# Altium PCB Timebase_PCB.PcbDoc
Units mm, origin at the board's own origin, x right, y up, seen from the top; angles counter-clockwise.
Board outline 50 x 100.01 mm, 4 copper layers (Top Layer, Int1 (GND), Int2 (PWR), Bottom Layer), stack 1.369 mm thick; 44 components, 34 nets, 226 pads, 801 vias.
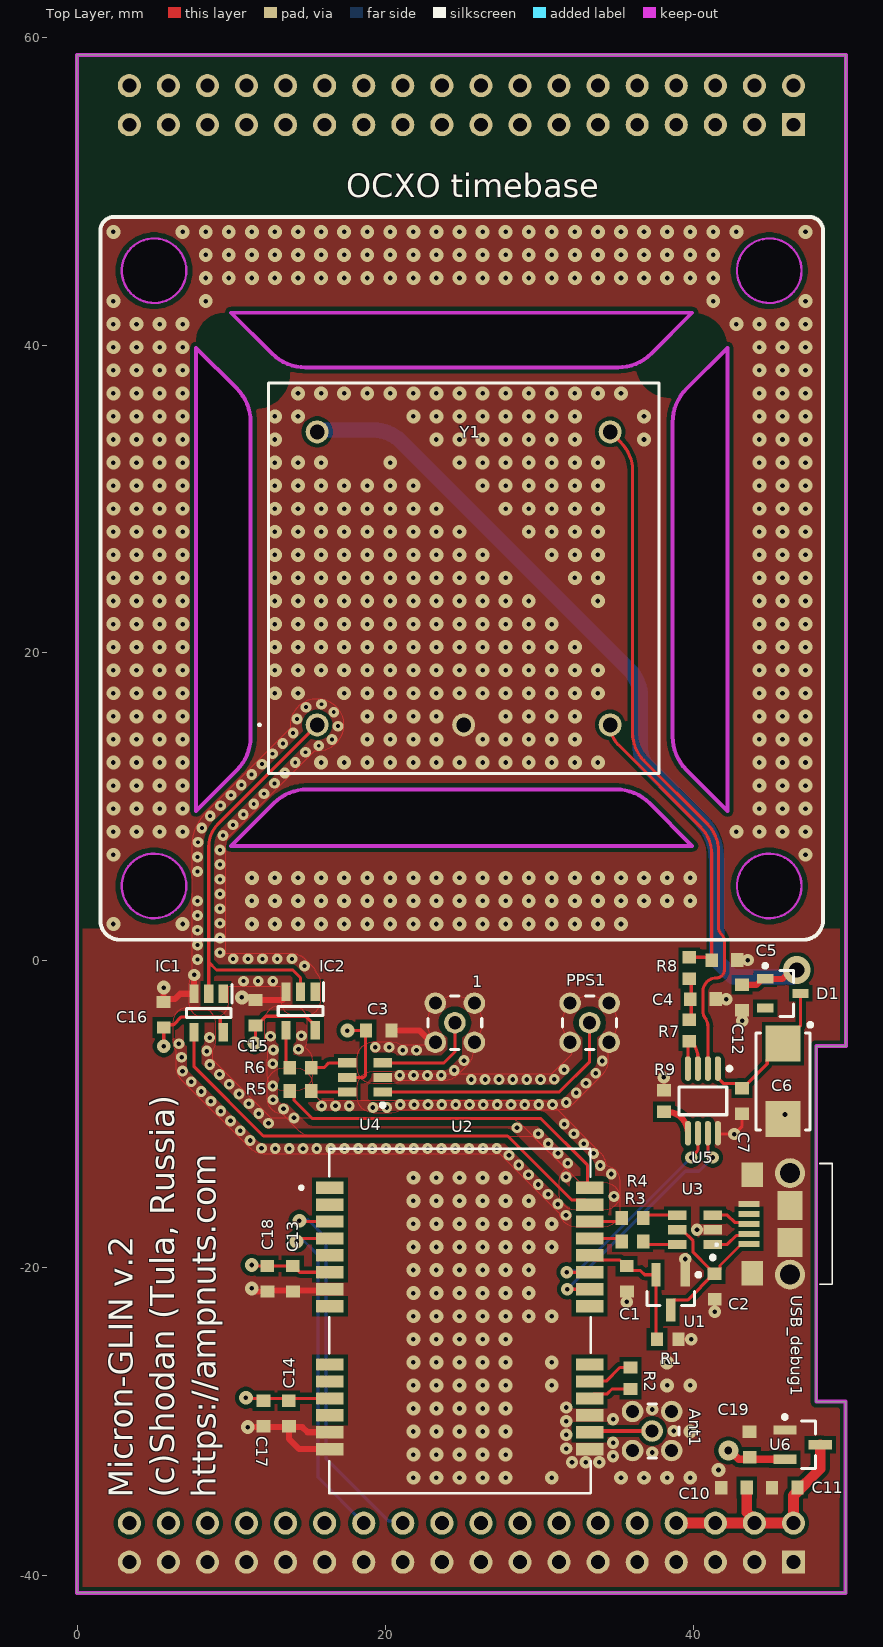
[diagram p0: Top Layer view]
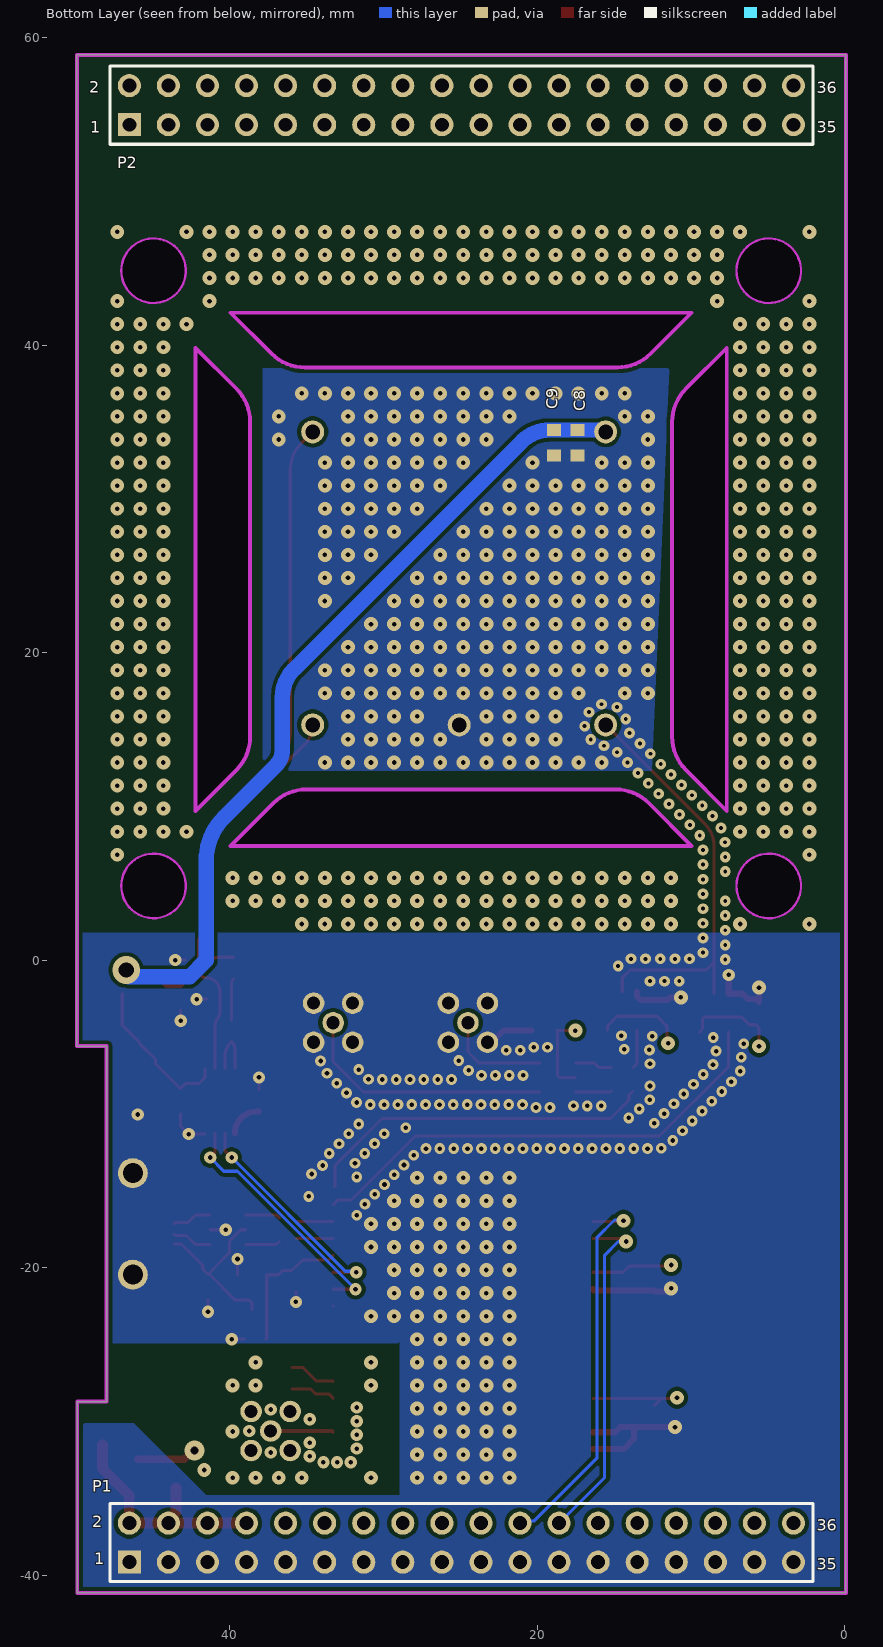
[diagram p1: Bottom Layer view, seen from below]
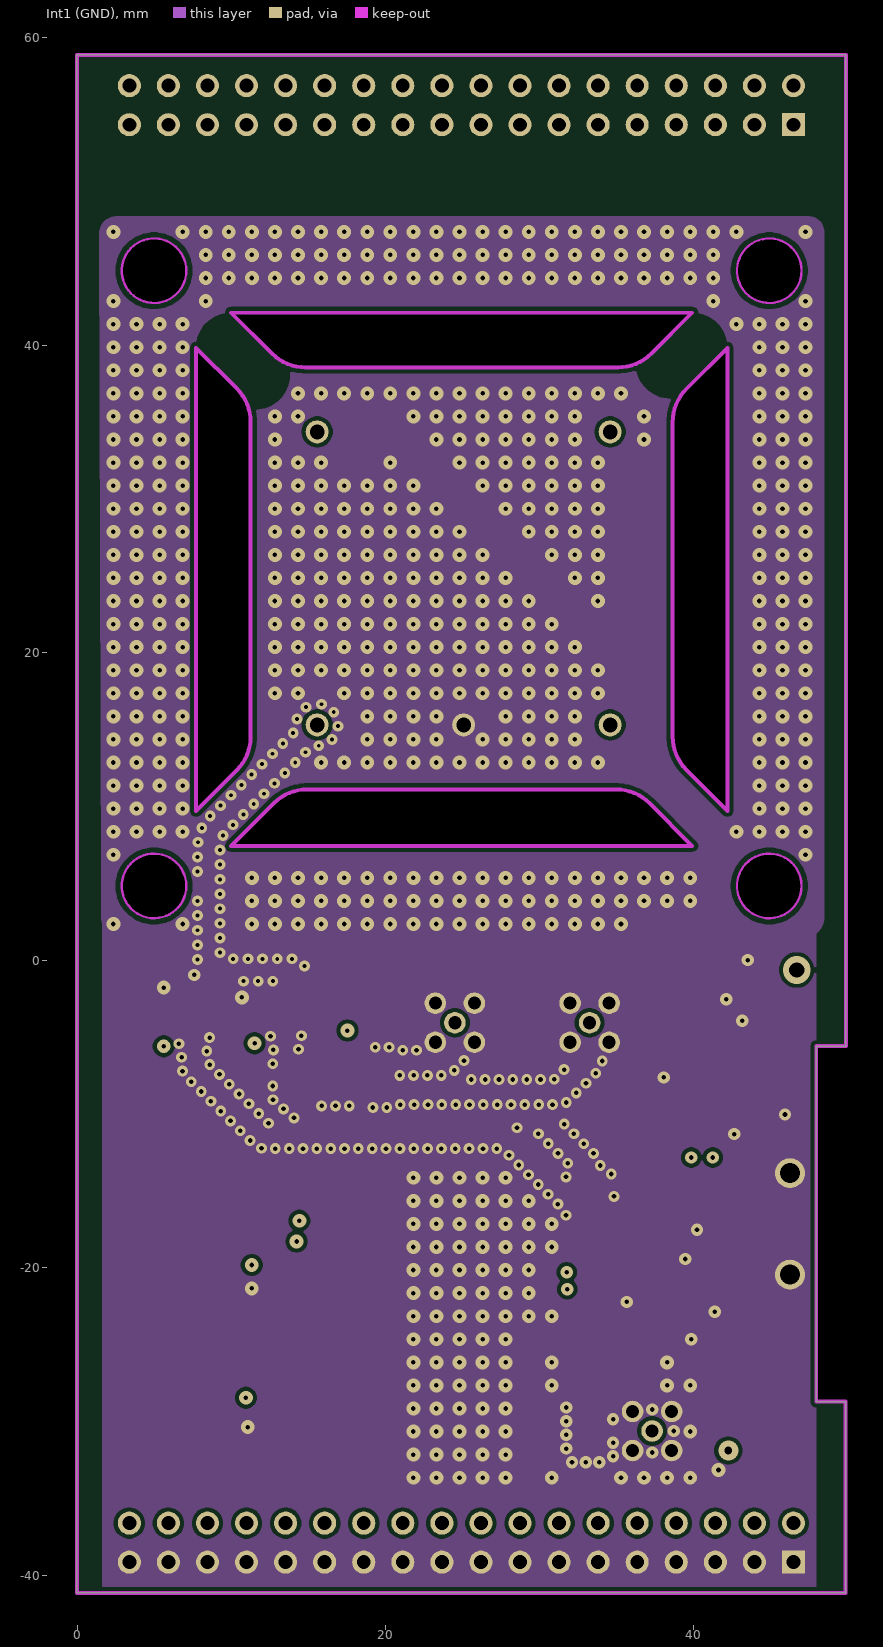
[diagram p2: Int1 (GND)]
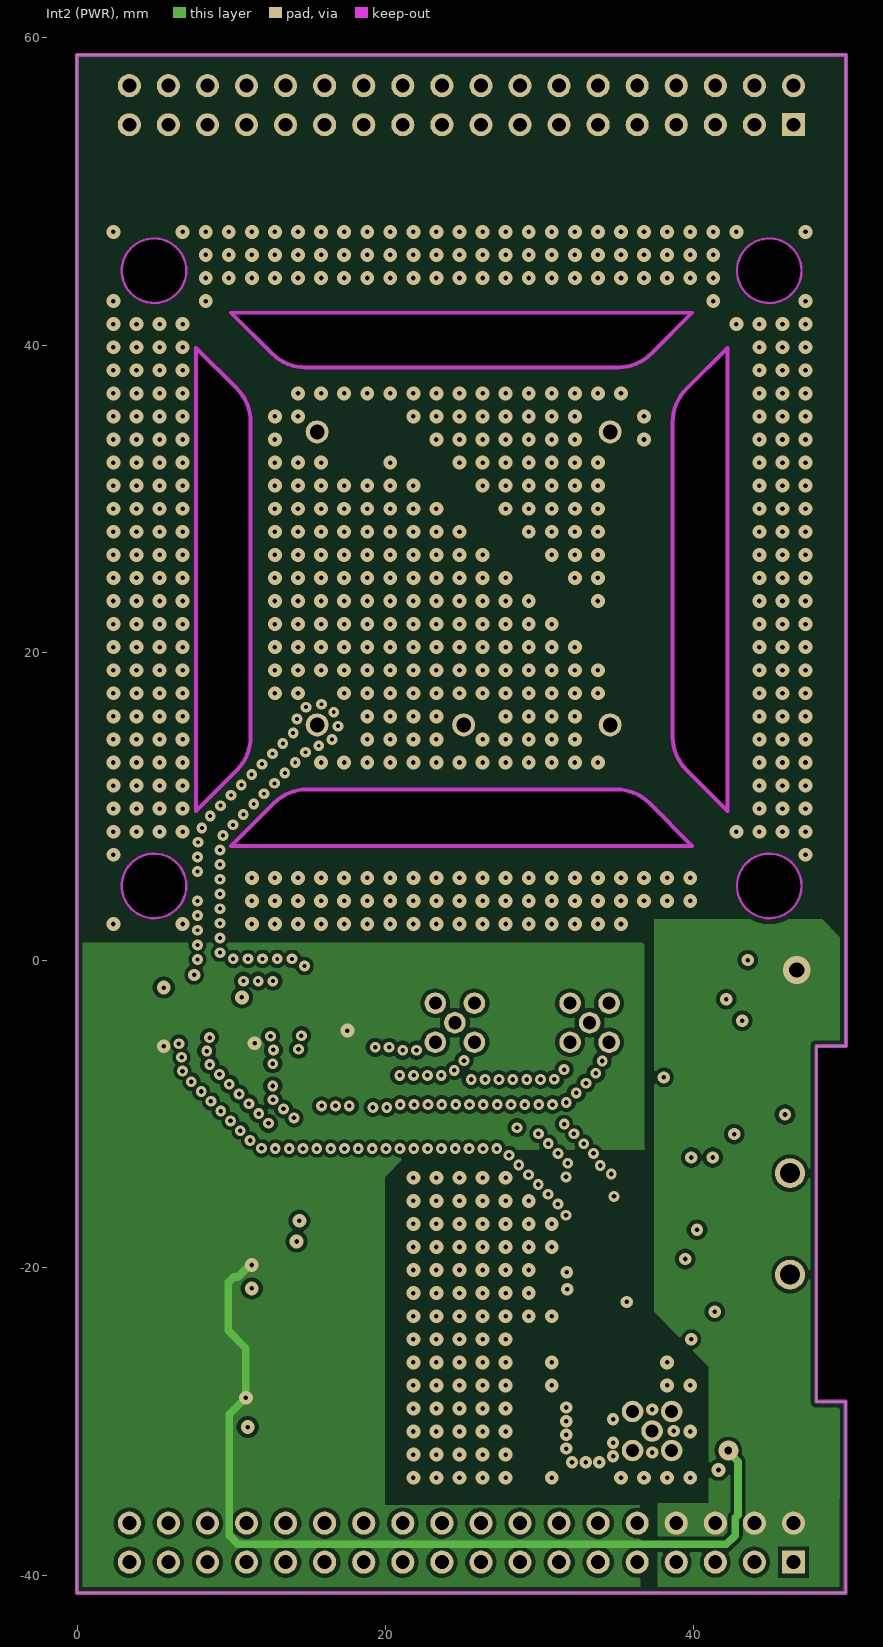
[diagram p3: Int2 (PWR)]

## Layer stack, top to bottom
Top Solder: solder mask 0.0254, SM-001, Dk 4
Top Layer: signal copper 0.035
Dielectric 1: prepreg 0.1295, PP-017, Dk 4.3
Dielectric 2: prepreg 0.1295, PP-017, Dk 4.3
Int1 (GND): signal copper 0.035
Dielectric 3: core 0.7112, Core-039, Dk 4.8
Int2 (PWR): signal copper 0.035
Dielectric 4: prepreg 0.1295, PP-017, Dk 4.3
Dielectric 5: prepreg 0.1295, PP-017, Dk 4.3
Bottom Layer: signal copper 0.035
Bottom Solder: solder mask 0.0254, SM-001, Dk 4

## Board outline
-0.063,-41.136 -0.063,58.864 49.937,58.864 49.937,-5.588 48.006,-5.588 48.006,-28.702 49.911,-28.702 49.911,-41.148 49.899,-41.136
cut-out: 39.57,12.373 cw(c41.738,14.541) 38.672,14.541 38.672,34.988 cw(c41.738,34.988) 39.57,37.156 42.228,39.814 42.228,9.715
cut-out: 9.97,7.429 12.755,10.214 cw(c14.923,8.046) 14.923,11.112 34.989,11.112 cw(c34.989,8.046) 37.157,10.214 39.942,7.429
cut-out: 7.684,9.715 7.684,39.814 10.342,37.156 cw(c8.174,34.988) 11.24,34.988 11.24,14.541 cw(c8.174,14.541) 10.342,12.373
cut-out: 12.628,39.442 ccw(c14.796,41.61) 14.796,38.544 35.116,38.544 ccw(c35.116,41.61) 37.284,39.442 39.942,42.1 9.97,42.1
cut-out: 44.953,42.731 cw(c44.953,44.831) 42.853,44.831 cw(c44.953,44.831) 44.953,46.931 cw(c44.953,44.831) 47.053,44.831 cw(c44.953,44.831)
cut-out: 42.853,4.831 ccw(c44.953,4.831) 44.953,2.731 ccw(c44.953,4.831) 47.053,4.831 ccw(c44.953,4.831) 44.953,6.931 ccw(c44.953,4.831)
cut-out: 4.953,2.731 cw(c4.953,4.831) 2.853,4.831 cw(c4.953,4.831) 4.953,6.931 cw(c4.953,4.831) 7.053,4.831 cw(c4.953,4.831)
cut-out: 4.953,42.731 cw(c4.953,44.831) 2.853,44.831 cw(c4.953,44.831) 4.953,46.931 cw(c4.953,44.831) 7.053,44.831 cw(c4.953,44.831)

## Design rules (kind name [scope] priority, off if disabled: settings)
BoardOutlineClearance [All] p1: gap=0.381 ignorepadtopadclearanceinfootprint=FALSE
Clearance "Clearance Polygons" [InPolygon] p1: gap=0.254 ignorepadtopadclearanceinfootprint=FALSE except(0: Arc-Hole Track-Hole SMDPad-Hole THPad-Hole Via-Hole Fill-Hole Poly-Hole Region-Hole Text-Hole)
Clearance [All] p2: gap=0.127 ignorepadtopadclearanceinfootprint=FALSE except(0: Arc-Hole Track-Hole SMDPad-Hole THPad-Hole Via-Hole Fill-Hole Poly-Hole Region-Hole Text-Hole)
ComponentClearance "HM-TRP & UFL" [InComponent('X1') vs InComponent('U1')] p1: gap=0 collisioncheckmode=3 verticalgap=0 showdistances=FALSE
ComponentClearance [All] p2: gap=0.025 collisioncheckmode=3 verticalgap=0.025 showdistances=FALSE
DiffPairsRouting [All] p1: maxlimit=10 minlimit=0.127 mostfreqgap=0.203 toplayer_minwidth=0.127 toplayer_maxwidth=0.381 toplayer_prefwidth=0.203 midlayer1_minwidth=0.127 midlayer1_maxwidth=0.381 midlayer1_prefwidth=0.203 midlayer2_minwidth=0.127 midlayer2_maxwidth=0.381 midlayer2_prefwidth=0.203 bottomlayer_minwidth=0.127 bottomlayer_maxwidth=0.381 bottomlayer_prefwidth=0.203 maxuncoupledlength=12.7
HoleSize [All] p1: absolutevalues=TRUE maxlimit=6.731 minlimit=0.254 maxpercent=80.000 minpercent=20.000
HoleToHoleClearance [All] p1: gap=0.254 allowstackedmicrovias=FALSE
MinimumAnnularRing [All] p1: minimumring=0.102
MinimumSolderMaskSliver [All] p1: minsoldermaskwidth=0
PlaneClearance [All] p1: clearance=0.254
PlaneConnect [All] p1: planeconnectstyle=Relief reliefexpansion=0.102 reliefentries=4 reliefconductorwidth=0.152 reliefairgap=0.152
PolygonConnect PolygonConnect_pwr_gnd [IsPoly] p1: connectstyle=Direct reliefconductorwidth=0.254 reliefentries=4 polygonreliefangle="90 Angle" airgapwidth=0.152
PolygonConnect PolygonConnect_1 [All] p2: connectstyle=Relief reliefconductorwidth=0.254 reliefentries=4 polygonreliefangle="90 Angle" airgapwidth=0.254
PolygonConnect "Via connect style" [isVia] p3: connectstyle=Direct reliefconductorwidth=0.254 reliefentries=4 polygonreliefangle="90 Angle" airgapwidth=0.254
RoutingCorners [All] p1: cornerstyle=45-Degree minsetback=1.25 maxsetback=1.25
RoutingVias [All] p1: holewidth=0.305 width=0.559 viastyle="Through Hole" minholewidth=0.254 minwidth=0.457 maxholewidth=2.54 maxwidth=2.896
SilkToSilkClearance [All] p1: silktosilkclearance=0
SilkToSolderMaskClearance [IsPad] p1: minsilkscreentomaskgap=0.127 clearancetoexposedcopper=TRUE
SolderMaskExpansion [All] p1: expansion=0.064 istentingtop=FALSE
Width GND [InNet('GND')] p1: maxlimit=0.762 minlimit=0.254 preferedwidth=0.508
Width Power [InNetClass('Power')] p2: maxlimit=1.016 minlimit=0.508 preferedwidth=0.762
Width 3V3 [InNetClass('3V3')] p3: maxlimit=0.762 minlimit=0.254 preferedwidth=0.508
Width [All] p4: maxlimit=10.16 minlimit=0.152 preferedwidth=0.203
20 further rules are at their usual default settings.

## Components (designator, comment, footprint, x,y, rotation, side; value= is the part's Value field where it differs from the comment)
1 "MMCX" MMCX2.54-V5 24.511,-4.064 r90 top
Ant1 "MMCX" MMCX2.54-V5 37.338,-30.607 r90 top
C1 "1uF" "CAP 0603" 35.687,-20.701 r90 top
C2 "1uF" "CAP 0603" 41.402,-21.209 r90 top
C3 "100nF" "CAP 0603" 19.558,-4.572 r180 top
C4 "1uF" "CAP 0603" 40.64,-2.54 r180 top
C5 "1uF" "CAP 0603" 42.037,0 r180 top
C6 "10uF 16V C" CAPMP6032X280N 45.847,-7.874 r270 top
C7 "100nF" "CAP 0603" 43.18,-9.144 r90 top
C8 "100nF" "CAP 0603" 17.399,33.655 r90 bottom
C9 "10uF" "CAP 0603" 18.923,33.655 r90 bottom
C10 "100nF" "CAP 0603" 42.672,-34.29 r0 top
C11 "10nF" "CAP 0603" 45.974,-34.29 r0 top
C12 "1uF" "CAP 0603" 43.18,-2.413 r90 top
C13 "100nF" "CAP 0603" 13.97,-20.701 r90 top
C14 "100nF" "CAP 0603" 13.716,-29.464 r90 top
C15 "100nF" "CAP 0603" 11.557,-3.429 r270 top
C16 "100nF" "CAP 0603" 5.588,-3.556 r270 top
C17 "100nF" "CAP 0603" 12.065,-29.464 r90 top
C18 "10nF" "CAP 0603" 12.319,-20.701 r90 top
C19 "1uF" "CAP 0603" 43.688,-31.496 r270 top
D1 "BAV99" INF-SOT23_N 45.84,-2.159 r0 top
IC1 "SN74LV1T34DBVR" SOT95P280X145-5N 8.509,-3.429 r270 top
IC2 "SN74LV1T34DBVR" SOT95P280X145-5N 14.478,-3.302 r270 top
P1 "Header 18X2" HDR2X18 46.527,-39.136 r180 bottom locked
P2 "Header 18X2" HDR2X18 46.527,54.324 r180 bottom locked
PPS1 "MMCX" MMCX2.54-V5 33.274,-4.064 r180 top
R1 "100K" 1608[0603] 38.354,-24.638 r0 top
R2 "0R" 1608[0603] 35.941,-27.178 r270 top
R3 "27R" 1608[0603] 36.068,-18.288 r0 top
R4 "27R" 1608[0603] 36.068,-16.764 r0 top
R5 "49.9R" 1608[0603] 14.478,-8.509 r0 top
R6 "49.9R" 1608[0603] 14.478,-6.985 r0 top
R7 "10K" 1608[0603] 39.751,-4.572 r270 top
R8 "10K" 1608[0603] 39.751,-0.508 r270 top
R9 "0R" 1608[0603] 38.1,-9.144 r90 top
U1 "MCP1702T-3302E/CB" SOT-23A-CB3_N 38.542,-21.597 r270 top
U2 "LEA-M8F" LEA 24.829,-23.289 r180 top
U3 "USBLC6-2" SOT23-6L 40.132,-17.526 r180 top
U4 "USBLC6-2" SOT23-6L 18.669,-7.62 r180 top
U5 "DAC8571IDGK" TI-DGK8_N 40.64,-9.144 r270 top
U6 "MCP1702T-3302E/CB" SOT-23A-CB3_N 47.117,-31.496 r0 top
USB_debug1 "10118193-0001LF" 101181930001LF 46.228,-17.145 r90 top
Y1 "Vectron C4550A1-0213" C4550C508SV120RFSA11128MHZ 15.558,15.303 r0 top locked

## Footprints (in the part's own frame and the unit in brackets; to place one, negate y for a bottom-side part, rotate by r counter-clockwise, add the part's x,y. Pads: shape width x height; smd on the part's side, far side on the other; paste and mask are expansions set on the pad)
1608[0603] [mm]
  rect 0.8x0.9 smd: 1(-0.7,0) 2(0.7,0)
  body extent -0.87,-0.48 0.87,0.48, height 1.3
101181930001LF [mm]
  rect 0.4x1.35 smd: 1(-1.3,2.6) 2(-0.65,2.6) 3(0,2.6) 4(0.65,2.6) 5(1.3,2.6)
  round 1.95 hole 1.3: MH1(-3.3,-0.075) MH2(3.3,-0.075)
  rect 1.6x1.4 smd: MP1(-3.2,2.375) MP4(3.2,2.375)
  rect 1.9x1.6 smd: MP2(-1.2,-0.075) MP3(1.2,-0.075)
  silkscreen extent -3.93,-2.83 3.93,4.75, body extent -3.93,-2.83 3.93,3.23, height 3.2
C4550C508SV120RFSA11128MHZ [mm]
  round 1.493 hole 0.96: 1(0,0) 2(9.525,0) 3(19.05,0) 4(19.05,19.05) 5(0,19.05)
  silkscreen extent -3.8,-3.17 22.22,22.22, body extent -3.17,-3.17 22.22,22.22, height 11.35
"CAP 0603" [mm]
  rect 0.8x0.9 smd: 1(-0.84,-0.01) 2(0.82,0)
  body extent -0.85,-0.45 0.85,0.45, height 0.8
CAPMP6032X280N [mm] "Capacitor, Polarized, Molded  Body 6.0x3.2mm, IPC Medium Density"
  rect 2.35x2.25 smd: 1(-2.45,0) 2(2.45,0)
  silkscreen extent -3.8,-1.75 3.15,1.9, body extent -3.15,-1.75 3.15,1.75, height 2.8
HDR2X18 [mm] "Connector; Header; 18x2 Position"
  rect 1.5x1.5 hole 0.9: 1(0,0)
  round 1.5 hole 0.9: 2(0,2.54) 3(2.54,0) 4(2.54,2.54) 5(5.08,0) 6(5.08,2.54) 7(7.62,0) 8(7.62,2.54) 9(10.16,0) 10(10.16,2.54) 11(12.7,0) 12(12.7,2.54) 13(15.24,0) 14(15.24,2.54) 15(17.78,0) 16(17.78,2.54) 17(20.32,0) 18(20.32,2.54) 19(22.86,0) 20(22.86,2.54) 21(25.4,0) 22(25.4,2.54) 23(27.94,0) 24(27.94,2.54) 25(30.48,0) 26(30.48,2.54) 27(33.02,0) 28(33.02,2.54) 29(35.56,0) 30(35.56,2.54) 31(38.1,0) 32(38.1,2.54) 33(40.64,0) 34(40.64,2.54) 35(43.18,0) 36(43.18,2.54)
  silkscreen extent -1.27,-1.27 44.45,3.81
INF-SOT23_N [mm] "SOT23, 3-Leads, Body 2.9x1.3 mm, Pitch 0.95 mm, IPC Medium Density"
  rect 1.05x0.6 smd: 1(-1.15,0.95) 2(-1.15,-0.95) 3(1.15,0)
  silkscreen extent -1.27,-1.5 0.7,1.92, body extent -0.7,-1.5 0.7,1.5, height 1.1
LEA [mm] "u-blox LEA GNSS module"
  rect 1.8x0.8 smd paste-4: 1(8.446,-8.5)
  rect 1.8x0.8 smd paste-0.4 mask+0.102: 2(8.446,-7.4) 3(8.446,-6.3) 4(8.445,-5.2) 5(8.445,-4.1) 6(8.445,-3) 7(8.445,-1.9) 8(8.445,-0.8) 9(8.445,3) 10(8.445,4.1) 11(8.445,5.2) 12(8.445,6.3) 13(8.445,7.4) 14(8.445,8.5) 16(-8.446,7.4) 17(-8.446,6.3) 18(-8.445,5.2) 19(-8.445,4.1) 20(-8.445,3) 21(-8.445,-0.8) 22(-8.445,-1.9) 23(-8.445,-3) 24(-8.445,-4.1) 25(-8.445,-5.2) 26(-8.445,-6.3) 27(-8.445,-7.4) 28(-8.445,-8.5)
  rect 1.8x0.8 smd paste-0.4: 15(-8.446,8.5)
  silkscreen extent -8.51,-11.04 10.33,11.36, body extent -8.5,-11.01 8.5,11.39, height 2.35
MMCX2.54-V5 [mm]
  round 1.4 hole 0.85: 1(0,0) 2(-1.27,-1.27) 3(1.27,-1.27) 4(1.27,1.27) 5(-1.27,1.27)
  silkscreen extent -1.75,-1.75 1.75,1.75, body extent -1.78,-1.75 1.73,1.75, height 4.42
SOT23-6L [mm]
  rect 1.2x0.6 smd: 1(-1.15,0.95) 2(-1.15,0) 3(-1.15,-0.95) 4(1.15,-0.95) 5(1.15,0) 6(1.15,0.95)
  silkscreen extent -1.28,1.68 -1.03,1.92, body extent -0.75,-1.52 0.75,1.53, height 1.45
SOT95P280X145-5N [mm]
  rect 1.2x0.6 smd: 1(-1.25,0.95) 2(-1.25,0) 3(-1.25,-0.95) 4(1.25,-0.95) 5(1.25,0.95)
  silkscreen extent -1.85,-1.45 0.3,1.5, body extent -1.4,-1.45 1.4,1.45, height 1.2
SOT-23A-CB3_N [mm] "SOT346, 3-Leads, Body 2.9x1.5mm, Pitch 0.95mm, Lead Span 2.6mm, IPC Medium Density"
  rect 1.5x0.6 smd: 1(-1.15,0.95) 2(-1.15,-0.95) 3(1.15,0)
  silkscreen extent -1.27,-1.55 0.85,1.93, body extent -0.85,-1.55 0.85,1.55, height 1.45
TI-DGK8_N [mm] "SOP, 8-Leads, Body 3x3mm, Pitch 0.65mm, IPC Medium Density"
  oval 1.6x0.4 smd: 1(-2.1,0.975) 2(-2.1,0.325) 3(-2.1,-0.325) 4(-2.1,-0.975) 5(2.1,-0.975) 6(2.1,-0.325) 7(2.1,0.325) 8(2.1,0.975)
  silkscreen extent -2.22,-1.55 0.9,1.85, body extent -1.55,-1.55 1.55,1.55, height 1.1

## Part data
1 Ant1 PPS1: library part COAX-M, "RF Coaxial PCB Connector, MMCX; Thru-Hole, Vertical Mount Plug,  50 Ohm Impedance", PackageDocument="Rev. A, 16-Jun-1997", ComponentLink1Description="Manufacturer Link", ComponentLink1URL=http://www.amphenolrf.com/, DatasheetDocument=30-May-2003, DrillSize="Corresponds to nominal value.", LatestRevisionDate=15-Jul-2004, LatestRevisionNote="Component Replaced.", PackageReference=908-21103, PCB_Layout="Complies with manufacturer's recommendation.", Published=15-Jul-2004, Publisher="Altium Limited"
C1 C2 C3 C4 C5 C7 C8 C9 C10 C11 C12 C13 C14 C15 C16 C17 C18 C19: library part "Cap Semi", "Capacitor (Semiconductor SIM Model)", LatestRevisionDate=29-May-2009, LatestRevisionNote="IPC-7351 Footprint Added.", Order=CC0603KRX7R8BB104, PackageDescription="Chip Capacitor", PackageReference=C1206, Published=8-Jun-2000, Publisher="Altium Limited"
C6: library part CTE6032-28_10UF_25V_10%_LESR0500, "Polarised capacitor", Case=C, Manufacturer=GENERIC, Manufacturer1 ComponentHeight=2.8mm, Manufacturer1 Example=AVX, Manufacturer1 Part Number=TPSC106K025R0500, Tolerance=±10%, Voltage=25V, Author="CERN DEM JLC", Component Type=Standard, CreateDate=05.05.2008, HelpURL=\\cern.ch\dfs\Applications\Altium\Datasheets\CTE-LESR_AVX_TPS.pdf, LatestRevisionDate=20.01.2009, Manufacturer Part Number=CTE6032-28_10UF_25V_10%_LESR0500, Mounted=Yes, Part Description="Low ESR 0R5 Solid Tantalum Chip Capacitor", Part Number=CTE6032-28_10UF_25V_10%_LESR0500, Pin Count=2, Sense=No, SMD=Yes, Socket=No, Status=Preferred
D1: "Silicon Switching Diode, SOT23, Reel, Green", Manufacturer=Infineon, Supplier Part Number 1=8_hDx09NysxyY_EZJdaSbs5L1p9U5ut-2MaZMQWGOaA, ComponentLink1Description="Manufacturer URL", ComponentLink1URL=http://www.infineon.com/, ComponentLink2Description=Datasheet, ComponentLink2URL=http://www.infineon.com/dgdl/bav99series.pdf?folderId=db3a30431400ef6801141b5844e103ea&fileId=db3a30431400ef6801141c1b237d042f, ComponentLink3Description="Package Specification", ComponentLink3URL=http://www.infineon.com/dgdl/smbta14_mmbta14.pdf?folderId=db3a30431441fb5d011445c30f210183&fileId=db3a30431441fb5d011445ef0201018c, Green=TRUE, Mounting Technology="Surface Mount", PackageDescription="3-Pin Small Outline Transistor Package, 1.3 x 2.9 mm Body, 0.95 mm Pitch", PackageReference=SOT23, PackageVersion=Apr-08, Packing=Reel, PartNumber=BAV99, Supplier 1=Arrow, Supplier 2=Farnell, Supplier 3=Farnell, Supplier Part Number 2=1056504RL, Supplier Part Number 3=1056504
IC1 IC2: "Integrated Circuit", Manufacturer_Name="Texas Instruments", Mouser Part Number=595-SN74LV1T34DBVR, Arrow Part Number=SN74LV1T34DBVR, Arrow Price/Stock=https://www.arrow.com/en/products/sn74lv1t34dbvr/texas-instruments?region=nac, Datasheet Link=http://www.ti.com/lit/gpn/sn74lv1t34, Height=1.45mm, Manufacturer_Part_Number=SN74LV1T34DBVR, Mouser Price/Stock=https://www.mouser.co.uk/ProductDetail/Texas-Instruments/SN74LV1T34DBVR?qs=8sOby8ZxZLE4ekkxA3S6Wg%3D%3D
P1 P2: "Header, 18-Pin, Dual row", LatestRevisionDate=17-Jul-2002, LatestRevisionNote="Re-released for DXP Platform.", Publisher="Altium Limited", System=Connector
R1 R2 R3 R4 R5 R6 R7 R8 R9: library part "Resistor 0805", Avail=20, Order=CR0603-JW-220GLF
U1 U6: "250 mA Low Quiescent Current LDO Regulator, 3-Pin SOT-23A, Extended Temperature, Tape and Reel", Supplier Part Number 1=MCP1702T-3302E/CBTR-ND, ComponentLink1Description=Datasheet, ComponentLink1URL=http://ww1.microchip.com/downloads/en/DeviceDoc/22008d.pdf, ComponentLink2Description="Packaging Specification", ComponentLink2URL=http://www.microchip.com/stellent/groups/techpub_sg/documents/packagingspec/en012702.pdf, ComponentLink3Description="Microchip.com Home", ComponentLink3URL=http://www.microchip.com/, DatasheetVersion="revD, Jun-2009", LatestRevisionDate=02-Dec-2009, LatestRevisionNote="Updated to datasheet revision D, Jun-2009", PackageDescription="3-Lead Plastic Small Outline Transistor (CB) [SOT-23A]", PackageReference=SOT-23A-CB3, PackageVersion="revBB, Aug-2009", Published=29-Jan-2009, Publisher="Altium Limited", Supplier 1=Digi-Key, Supplier 2=Digi-Key, Supplier 3=Digi-Key, Supplier 4=Farnell, Supplier Part Number 2=MCP1702T-3302E/CBCT-ND, Supplier Part Number 3=MCP1702T-3302E/CBDKR-ND, Supplier Part Number 4=1331490
U2: library part LEA, "u-blox LEA GNSS module", Manufacturer=u-blox, Part Description="u-blox LEA-M8 GNSS module"
U5: "Low-Power Rail-to-Rail Output 16-Bit I2C Input DAC, -40 to 105 degC, 8-pin SOP (DGK8), Green (RoHS & no Sb/Br)", Manufacturer="Texas Instruments", Power Consumption(Typ)(mW)=0.42, Supplier Part Number 1=296-26051-5-ND, Code_JEDEC=MO-187, ComponentLink1Description="Manufacturer URL", ComponentLink1URL=http://www.ti.com/, ComponentLink2Description=Datasheet, ComponentLink2URL=http://www.ti.com/general/docs/lit/getliterature.tsp?genericPartNumber=DAC8571&fileType=pdf, ComponentLink3Description="Package Specification", ComponentLink3URL=http://www.ti.com/litv/pdf/mpds028d, DAC Channels=1, DatasheetVersion=SLAS373A, DNL(Max)(+/-LSB)=1, Eco-Plan="Green (RoHS & no Sb/Br)", INL(Max)(+/-LSB)=65, Interface="Serial I2C", Mounting Technology="Surface Mount", PackageDescription="8-Pin Thin Small Outline, Body 3 x 3 mm, Pitch 0.65 mm", PackageReference=DGK8, PackageVersion="4073329/E, 05/2006", PartNumber=DAC8571IDGK, Resolution(Bits)=16, Settling Time(us)=8, SubFamily="Precision DAC (=<10MSPS)", Supplier 1=Digi-Key, Supplier 2=Newark, Supplier 3=Mouser, Supplier Part Number 2=20H5068, Supplier Part Number 3=595-DAC8571IDGK
USB_debug1: "Connector", Manufacturer_Name=Amphenol, Mouser Part Number=649-10118193-0001LF, Arrow Part Number=10118193-0001LF, Arrow Price/Stock=https://www.arrow.com/en/products/10118193-0001lf/amphenol-fci?region=nac, Datasheet Link=https://datasheet.datasheetarchive.com/originals/distributors/Datasheets_SAMA/035be5b62fc6b7a9cadde58b72893b5e.pdf, Height=3.1mm, Manufacturer_Part_Number=10118193-0001LF, Mouser Price/Stock=https://www.mouser.co.uk/ProductDetail/Amphenol-FCI/10118193-0001LF?qs=Ywefl8B65e63Nsqd%252B8HZaQ%3D%3D
Y1: library part C4550C508SV120RFSA1112.8MHZ, "Crystal or Oscillator", Manufacturer_Name=Vectron, Height=11.25mm, Manufacturer_Part_Number="Vectron C4550A1-0213"
U3 U4: Avail=1, Order=USBLC6-2

## Via types
v1: diameter 0.9, hole 0.3, Top Layer to Bottom Layer, tented both sides, 613 vias
v2: diameter 0.7, hole 0.3, Top Layer to Bottom Layer, 106 vias
v3: diameter 0.7, hole 0.254, Top Layer to Bottom Layer, 51 vias
v4: diameter 0.8, hole 0.3, Top Layer to Bottom Layer, tented both sides, 29 vias
v5: diameter 1.3, hole 0.5, Top Layer to Bottom Layer, tented both sides, 1 vias
v6: diameter 1.8, hole 1, Top Layer to Bottom Layer, tented both sides, 1 vias

## Nets (pads, with @x,y where several pads share a name; then routed paths per layer and width w, separated by ;. In a path a pad name is that pad's centre, name@x,y a point inside that pad or via, vN(x,y) a via of type N, cw(c..) or ccw(c..) an arc to the next point about the centre after c; other vN are vias at no path point)
10MHz: IC1.4 U2.27 | length 31.7
  Top Layer w0.203: IC1.4 7.559,-6.924 12.065,-11.43 27.94,-11.43 32.1,-15.59 32.975,-15.59 U2.27
"10MHz Out": IC2.4 R6.1 | length 2.5
  Top Layer w0.203: IC2.4 13.528,-6.735 R6.1
+3.3V: C3.2 C13.2 C14.2 C15.2 C16.2 C17.2 C18.2 C19.2 IC1.5 IC2.5 U2.6 U2.11 U4.5 U6.2 | length 91.2
  Top Layer w0.203: v1(5.588,-5.588) C16.2 5.774,-4.19 6.224,-4.19 6.731,-3.683 9.142,-3.683 9.261,-3.802 9.261,-4.481 IC1.5 ; v1(10.922,-28.448) 10.963,-28.489 U2.11 ; v1(11.303,-19.812) 11.372,-19.881 C18.2 C13.2 14.02,-19.881 14.428,-20.289 U2.6 ; v1@11.43,-5.461 11.557,-5.334 C15.2 11.607,-4.249 12.212,-3.644 14.82,-3.644 15.428,-4.252 IC2.5 ; C17.2 C17.2@12.364,-28.942 ; U4.5 18.58,-7.62 18.698,-7.501 18.698,-4.612 C3.2 v1(17.526,-4.572)
  Top Layer w0.5: v5(42.291,-31.877) 42.399,-31.877 42.968,-32.446 U6.2
  Int2 (PWR) w0.5: v1(11.303,-19.812) 11.195,-19.812 10.411,-20.596 10.138,-20.596 9.779,-20.955 9.779,-24.076 10.922,-25.219 v1(10.922,-28.448) 9.84,-29.53 9.84,-37.399 10.414,-37.973 42.164,-37.973 42.735,-37.402 42.735,-36.254 42.926,-36.063 42.926,-32.62 42.291,-31.985 v5(42.291,-31.877)
  other v1: 11.493,-5.397
+3.3Vusb: C1.2 R1.1 U1.2 U2.24 | length 9.1
  Top Layer w0.203: U2.24 33.573,-19.487 35.244,-19.487 35.637,-19.881 C1.2 35.986,-20.179 36.581,-20.179 36.848,-20.447 U1.2 37.592,-24.576 R1.1
+5V: C8.2 C9.2 C10.2 C11.2 C12.2 D1.1 P1.2 P1.4 P1.6 P1.8 U6.3 Y1.5 | length 73.1
  Top Layer w0.4: C12.2 44.131,-1.593 44.365,-1.359 44.365,-1.309 44.465,-1.209 D1.1 45.815,-1.209 46.389,-0.635 v6(46.736,-0.635)
  Top Layer w0.7: P1.8@38.919,-36.584 P1.8 P1.6 P1.4 ; C10.2 43.492,-35.885 43.987,-36.38 P1.4 ; U6.3 48.267,-33.058 46.527,-34.798 P1.2 P1.4
  Bottom Layer w1: Y1.5 15.558,34.475 C8.2 C9.2 19.21,34.475 cw(c19.21,31.935) 21.006,33.731 35.832,18.905 cw(c34.036,17.109) 36.576,17.109 36.576,13.716 ccw(c38.109,13.716) 37.025,12.632 40.353,9.304 40.354,9.303 cw(c37.521,6.468) 41.529,6.468 41.529,6.466 41.529,0 42.609,-1.08 v6@46.546,-1.08
DGND: 1.2 1.3 1.4 1.5 Ant1.2 Ant1.3 Ant1.4 Ant1.5 C1.1 C2.1 C3.1 C4.1 C5.1 C6.2 C7.1 C8.1 C9.1 C10.1 C11.1 C12.1 C13.1 C14.1 C15.1 C16.1 C17.1 C18.1 C19.1 IC1.3 IC2.3 P1.1 P1.3 P1.5 P1.7 P1.9 P1.11 P1.13 P1.15 P1.17 P1.19 P1.21 P1.23 P1.25 P1.27 P1.29 P1.31 P1.33 P1.35 PPS1.2 PPS1.3 PPS1.4 PPS1.5 R1.2 R9.2 U1.1 U2.7 U2.13 U2.14 U2.15 U2.17 U3.2 U4.2 U5.8 U6.1 USB_debug1.5 USB_debug1.MH1 USB_debug1.MH2 USB_debug1.MP1 USB_debug1.MP2 USB_debug1.MP3 USB_debug1.MP4 Y1.2 | length 35.1
  Top Layer w0.203: v4(35.697,-22.215) C1.1 ; R9.2 v4(38.1,-7.62) ; R1.2 v4(39.878,-24.638) ; U1.1 v4(39.492,-19.426) ; v4(40.259,-17.526) U3.2 ; v4(41.412,-22.85) C2.1 ; C4.1 v4(42.154,-2.53) ; U5.8 41.674,-11.303 v4(42.672,-11.303) 43.19,-10.785 C7.1 ; C5.1 v4(43.551,0.01) ; v4(43.19,-3.927) C12.1
  Top Layer w0.4: v1(5.588,-1.778) 5.578,-1.788 C16.1 5.778,-2.516 6.322,-2.516 6.659,-2.179 IC1.3 v4(7.559,-0.955) ; v1(10.668,-2.413) 11.371,-2.413 C15.1 13.291,-2.589 13.528,-2.352 IC2.3 ; v1(11.049,-30.353) C14.1@13.726,-30.353 ; v1(11.303,-21.336) 11.508,-21.541 C18.1 12.405,-21.465 16.307,-21.465 U2.7 ; C14.1 C14.1@13.726,-30.353 ; U2.14 14.39,-31.789 13.726,-31.125 C14.1@13.726,-30.353 ; U2.13 14.941,-30.689 14.605,-30.353 C14.1@13.726,-30.353 ; C3.1 22.198,-4.562 22.97,-5.334 1.5
  other v1: 21.813,-33.643 23.313,-33.643 24.813,-33.643 26.313,-33.643 27.813,-33.643 30.813,-33.643 35.313,-33.643 36.813,-33.643 38.313,-33.643 39.813,-33.643 41.656,-33.147 21.813,-32.143 23.313,-32.143 24.813,-32.143 26.313,-32.143 27.813,-32.143 21.813,-30.643 23.313,-30.643 24.813,-30.643 26.313,-30.643 27.813,-30.643 39.813,-30.643 21.813,-29.143 23.313,-29.143 24.813,-29.143 26.313,-29.143 27.813,-29.143 21.813,-27.643 23.313,-27.643 24.813,-27.643 26.313,-27.643 27.813,-27.643 30.813,-27.643 38.313,-27.643 39.813,-27.643 21.813,-26.143 23.313,-26.143 24.813,-26.143 26.313,-26.143 27.813,-26.143 30.813,-26.143 38.313,-26.143 21.813,-24.643 23.313,-24.643 24.813,-24.643 26.313,-24.643 27.813,-24.643 21.813,-23.143 23.313,-23.143 24.813,-23.143 26.313,-23.143 27.813,-23.143 29.313,-23.143 30.813,-23.143 21.813,-21.643 23.313,-21.643 24.813,-21.643 26.313,-21.643 27.813,-21.643 29.313,-21.643 21.813,-20.143 23.313,-20.143 24.813,-20.143 26.313,-20.143 27.813,-20.143 29.313,-20.143 21.813,-18.643 23.313,-18.643 24.813,-18.643 26.313,-18.643 27.813,-18.643 29.313,-18.643 30.813,-18.643 21.813,-17.143 23.313,-17.143 24.813,-17.143 26.313,-17.143 27.813,-17.143 29.313,-17.143 30.813,-17.143 21.813,-15.643 23.313,-15.643 24.813,-15.643 26.313,-15.643 27.813,-15.643 29.313,-15.643 21.813,-14.143 23.313,-14.143 24.813,-14.143 26.313,-14.143 27.813,-14.143 2.313,2.357 6.813,2.357 11.313,2.357 12.813,2.357 14.313,2.357 15.813,2.357 17.313,2.357 18.813,2.357 20.313,2.357 21.813,2.357 23.313,2.357 24.813,2.357 26.313,2.357 27.813,2.357 29.313,2.357 30.813,2.357 32.313,2.357 33.813,2.357 35.313,2.357 11.313,3.857 12.813,3.857 14.313,3.857 15.813,3.857 17.313,3.857 18.813,3.857 20.313,3.857 21.813,3.857 23.313,3.857 24.813,3.857 26.313,3.857 27.813,3.857 29.313,3.857 30.813,3.857 32.313,3.857 33.813,3.857 35.313,3.857 36.813,3.857 38.313,3.857 39.813,3.857 11.313,5.357 12.813,5.357 14.313,5.357 15.813,5.357 17.313,5.357 18.813,5.357 20.313,5.357 21.813,5.357 23.313,5.357 24.813,5.357 26.313,5.357 27.813,5.357 29.313,5.357 30.813,5.357 32.313,5.357 33.813,5.357 35.313,5.357 36.813,5.357 38.313,5.357 39.813,5.357 2.313,6.857 47.313,6.857 2.313,8.357 3.813,8.357 5.313,8.357 6.813,8.357 42.813,8.357 44.313,8.357 45.813,8.357 47.313,8.357 2.313,9.857 3.813,9.857 5.313,9.857 6.813,9.857 44.313,9.857 45.813,9.857 47.313,9.857 2.313,11.357 3.813,11.357 5.313,11.357 6.813,11.357 44.313,11.357 45.813,11.357 47.313,11.357 2.313,12.857 3.813,12.857 5.313,12.857 6.813,12.857 15.813,12.857 17.313,12.857 18.813,12.857 20.313,12.857 21.813,12.857 23.313,12.857 24.813,12.857 26.313,12.857 27.813,12.857 29.313,12.857 30.813,12.857 32.313,12.857 33.813,12.857 44.313,12.857 45.813,12.857 47.313,12.857 2.313,14.357 3.813,14.357 5.313,14.357 6.813,14.357 18.813,14.357 20.313,14.357 21.813,14.357 23.313,14.357 26.313,14.357 27.813,14.357 29.313,14.357 30.813,14.357 32.313,14.357 44.313,14.357 45.813,14.357 47.313,14.357 2.313,15.857 3.813,15.857 5.313,15.857 6.813,15.857 18.813,15.857 20.313,15.857 21.813,15.857 23.313,15.857 27.813,15.857 29.313,15.857 30.813,15.857 32.313,15.857 44.313,15.857 45.813,15.857 47.313,15.857 2.313,17.357 3.813,17.357 5.313,17.357 6.813,17.357 12.813,17.357 14.313,17.357 17.313,17.357 18.813,17.357 20.313,17.357 21.813,17.357 23.313,17.357 24.813,17.357 26.313,17.357 27.813,17.357 29.313,17.357 30.813,17.357 32.313,17.357 33.813,17.357 44.313,17.357 45.813,17.357 47.313,17.357 2.313,18.857 3.813,18.857 5.313,18.857 6.813,18.857 12.813,18.857 14.313,18.857 15.813,18.857 17.313,18.857 18.813,18.857 20.313,18.857 21.813,18.857 23.313,18.857 24.813,18.857 26.313,18.857 27.813,18.857 29.313,18.857 30.813,18.857 32.313,18.857 33.813,18.857 44.313,18.857 45.813,18.857 47.313,18.857 2.313,20.357 3.813,20.357 5.313,20.357 6.813,20.357 12.813,20.357 14.313,20.357 15.813,20.357 17.313,20.357 18.813,20.357 20.313,20.357 21.813,20.357 23.313,20.357 24.813,20.357 26.313,20.357 27.813,20.357 29.313,20.357 30.813,20.357 32.313,20.357 44.313,20.357 45.813,20.357 47.313,20.357 2.313,21.857 3.813,21.857 5.313,21.857 6.813,21.857 12.813,21.857 14.313,21.857 15.813,21.857 17.313,21.857 18.813,21.857 20.313,21.857 21.813,21.857 23.313,21.857 24.813,21.857 26.313,21.857 27.813,21.857 29.313,21.857 30.813,21.857 44.313,21.857 45.813,21.857 47.313,21.857 2.313,23.357 3.813,23.357 5.313,23.357 6.813,23.357 12.813,23.357 14.313,23.357 15.813,23.357 17.313,23.357 18.813,23.357 20.313,23.357 21.813,23.357 23.313,23.357 24.813,23.357 26.313,23.357 27.813,23.357 29.313,23.357 33.813,23.357 44.313,23.357 45.813,23.357 47.313,23.357 2.313,24.857 3.813,24.857 5.313,24.857 6.813,24.857 12.813,24.857 14.313,24.857 15.813,24.857 17.313,24.857 18.813,24.857 20.313,24.857 21.813,24.857 23.313,24.857 24.813,24.857 26.313,24.857 27.813,24.857 32.313,24.857 33.813,24.857 44.313,24.857 45.813,24.857 47.313,24.857 2.313,26.357 3.813,26.357 5.313,26.357 6.813,26.357 12.813,26.357 14.313,26.357 15.813,26.357 17.313,26.357 18.813,26.357 20.313,26.357 21.813,26.357 23.313,26.357 24.813,26.357 26.313,26.357 30.813,26.357 32.313,26.357 33.813,26.357 44.313,26.357 45.813,26.357 47.313,26.357 2.313,27.857 3.813,27.857 5.313,27.857 6.813,27.857 12.813,27.857 14.313,27.857 15.813,27.857 17.313,27.857 18.813,27.857 20.313,27.857 21.813,27.857 23.313,27.857 24.813,27.857 29.313,27.857 30.813,27.857 32.313,27.857 33.813,27.857 44.313,27.857 45.813,27.857 47.313,27.857 2.313,29.357 3.813,29.357 5.313,29.357 6.813,29.357 12.813,29.357 14.313,29.357 15.813,29.357 17.313,29.357 18.813,29.357 20.313,29.357 21.813,29.357 23.313,29.357 27.813,29.357 29.313,29.357 30.813,29.357 32.313,29.357 33.813,29.357 44.313,29.357 45.813,29.357 47.313,29.357 2.313,30.857 3.813,30.857 5.313,30.857 6.813,30.857 12.813,30.857 14.313,30.857 15.813,30.857 17.313,30.857 18.813,30.857 20.313,30.857 21.813,30.857 26.313,30.857 27.813,30.857 29.313,30.857 30.813,30.857 32.313,30.857 33.813,30.857 44.313,30.857 45.813,30.857 47.313,30.857 2.313,32.357 3.813,32.357 5.313,32.357 6.813,32.357 12.813,32.357 14.313,32.357 15.813,32.357 20.313,32.357 24.813,32.357 26.313,32.357 27.813,32.357 29.313,32.357 30.813,32.357 32.313,32.357 33.813,32.357 44.313,32.357 45.813,32.357 47.313,32.357 2.313,33.857 3.813,33.857 5.313,33.857 6.813,33.857 12.813,33.857 23.313,33.857 24.813,33.857 26.313,33.857 27.813,33.857 29.313,33.857 30.813,33.857 32.313,33.857 36.813,33.857 44.313,33.857 45.813,33.857 47.313,33.857 2.313,35.357 3.813,35.357 5.313,35.357 6.813,35.357 12.813,35.357 14.313,35.357 21.813,35.357 23.313,35.357 24.813,35.357 26.313,35.357 27.813,35.357 29.313,35.357 30.813,35.357 32.313,35.357 36.813,35.357 44.313,35.357 45.813,35.357 47.313,35.357 2.313,36.857 3.813,36.857 5.313,36.857 6.813,36.857 14.313,36.857 15.813,36.857 17.313,36.857 18.813,36.857 20.313,36.857 21.813,36.857 23.313,36.857 24.813,36.857 26.313,36.857 27.813,36.857 29.313,36.857 30.813,36.857 32.313,36.857 33.813,36.857 35.313,36.857 44.313,36.857 45.813,36.857 47.313,36.857 2.313,38.357 3.813,38.357 5.313,38.357 6.813,38.357 44.313,38.357 45.813,38.357 47.313,38.357 2.313,39.857 3.813,39.857 5.313,39.857 6.813,39.857 44.313,39.857 45.813,39.857 47.313,39.857 2.313,41.357 3.813,41.357 5.313,41.357 6.813,41.357 42.813,41.357 44.313,41.357 45.813,41.357 47.313,41.357 2.313,42.857 8.313,42.857 41.313,42.857 47.313,42.857 8.313,44.357 9.813,44.357 11.313,44.357 12.813,44.357 14.313,44.357 15.813,44.357 17.313,44.357 18.813,44.357 20.313,44.357 21.813,44.357 23.313,44.357 24.813,44.357 26.313,44.357 27.813,44.357 29.313,44.357 30.813,44.357 32.313,44.357 33.813,44.357 35.313,44.357 36.813,44.357 38.313,44.357 39.813,44.357 41.313,44.357 8.313,45.857 9.813,45.857 11.313,45.857 12.813,45.857 14.313,45.857 15.813,45.857 17.313,45.857 18.813,45.857 20.313,45.857 21.813,45.857 23.313,45.857 24.813,45.857 26.313,45.857 27.813,45.857 29.313,45.857 30.813,45.857 32.313,45.857 33.813,45.857 35.313,45.857 36.813,45.857 38.313,45.857 39.813,45.857 41.313,45.857 2.313,47.357 6.813,47.357 8.313,47.357 9.813,47.357 11.313,47.357 12.813,47.357 14.313,47.357 15.813,47.357 17.313,47.357 18.813,47.357 20.313,47.357 21.813,47.357 23.313,47.357 24.813,47.357 26.313,47.357 27.813,47.357 29.313,47.357 30.813,47.357 32.313,47.357 33.813,47.357 35.313,47.357 36.813,47.357 38.313,47.357 39.813,47.357 41.313,47.357 42.813,47.357 47.313,47.357
  other v2: 31.739,-16.585 31.212,-15.856 34.862,-15.354 30.575,-15.219 29.939,-14.583 31.74,-14.089 29.303,-13.946 34.677,-13.895 33.963,-13.347 28.666,-13.31 31.855,-13.197 28.03,-12.674 31.218,-12.56 33.526,-12.56 12.838,-12.246 13.738,-12.246 14.638,-12.246 15.538,-12.246 16.438,-12.246 17.338,-12.246 18.238,-12.246 19.138,-12.246 20.038,-12.246 20.938,-12.246 21.838,-12.246 22.738,-12.246 23.638,-12.246 24.538,-12.246 25.438,-12.246 26.338,-12.246 27.238,-12.246 11.938,-12.231 30.582,-11.924 32.89,-11.924 11.199,-11.717 29.946,-11.287 32.253,-11.288 10.562,-11.081 28.551,-10.887 31.617,-10.651 12.394,-10.605 9.926,-10.445 14.052,-10.252 11.757,-9.968 9.289,-9.808 13.371,-9.664 19.184,-9.571 20.084,-9.576 15.849,-9.471 16.749,-9.471 17.649,-9.471 20.964,-9.386 21.864,-9.386 22.764,-9.386 23.664,-9.386 24.564,-9.386 25.464,-9.386 26.364,-9.386 27.264,-9.386 28.164,-9.386 29.064,-9.386 29.964,-9.386 30.864,-9.386 11.121,-9.332 31.753,-9.248 8.653,-9.172 12.688,-9.078 10.484,-8.696 32.405,-8.627 8.017,-8.535 12.672,-8.178 9.848,-8.059 33.041,-7.991 7.38,-7.899 25.58,-7.754 26.48,-7.754 27.38,-7.754 28.28,-7.754 29.18,-7.754 30.08,-7.754 30.98,-7.744 20.928,-7.486 21.828,-7.486 22.728,-7.486 23.628,-7.486 9.212,-7.423 33.677,-7.355 6.803,-7.209 24.469,-7.165 31.616,-7.108 8.575,-6.786 12.672,-6.727 34.09,-6.555 25.103,-6.526 6.743,-6.311 8.375,-5.909 21.117,-5.854 22.017,-5.854 12.712,-5.828 14.344,-5.782 19.337,-5.664 20.237,-5.664 6.572,-5.427 8.565,-5.029 12.522,-4.948 14.534,-4.902
  other v3: 10.771,-1.361 11.725,-1.361 12.679,-1.361 14.744,-0.383 7.783,0.041 10.1,0.091 11.054,0.091 12.008,0.091 12.962,0.091 13.916,0.091 9.235,0.492 7.783,0.995 9.235,1.446 7.783,1.949 9.235,2.4 7.783,2.903 9.235,3.354 7.783,3.857 9.235,4.308 9.235,5.262 7.783,5.765 9.235,6.216 7.783,6.719 9.235,7.17 7.806,7.673 9.438,8.102 8.059,8.593 10.085,8.804 8.605,9.375 10.76,9.478 9.279,10.05 11.434,10.153 9.953,10.725 12.109,10.827 10.628,11.399 12.783,11.502 11.303,12.074 13.458,12.177 11.977,12.749 14.132,12.851 12.652,13.423 14.807,13.526 15.665,13.943 13.326,14.098 16.528,14.351 14.001,14.772 16.921,15.22 14.254,15.692 16.64,16.131 14.828,16.454 15.833,16.641
  other v4: 32.131,-32.639 33.02,-32.639 33.909,-32.639 34.798,-32.258 37.338,-32.004 31.75,-31.75 34.798,-31.369 31.75,-30.861 38.735,-30.607 31.75,-29.972 34.798,-29.845 37.338,-29.21 31.75,-29.083 45.974,-10.033
"Disciplined 30.72 MHz": U2.9
EFC: C5.2 R8.1 Y1.3 | length 19.4
  Top Layer w0.203: Y1.3 ccw(c36.448,15.303) 35.147,14.002 40.473,8.676 cw(c38.677,6.88) 41.217,6.88 C5.2 ccw(c40.753,-0.464) 40.753,0.192 R8.1
FREQ_PHASE_IN1: U2.21 | length 0
  Top Layer w0.203: U2.21@33.264,-22.479 U2.21
Net1_1: 1.1 U4.3 | length 6.9
  Top Layer w0.203: U4.3 23.81,-6.67 24.511,-5.969 1.1
NetAnt1_1: Ant1.1 U2.16 | length 4.1
  Top Layer w0.203: U2.16 U2.16@33.356,-30.607
  Top Layer w0.245: U2.16@33.356,-30.607 Ant1.1
NetC2_2: C2.2 U1.3 U3.5 USB_debug1.1 | length 11.3
  Top Layer w0.203: U1.3 38.542,-22.297 38.74,-22.099 39.642,-22.099 C2.2@41.352,-20.389 ; U3.5 39.282,-17.526 40.005,-18.249 40.005,-18.992 41.053,-20.04 41.053,-20.09 C2.2@41.352,-20.389 ; USB_debug1.1 43.153,-18.445 41.751,-19.847 41.751,-20.09 41.452,-20.389 C2.2 C2.2@41.352,-20.389
NetC4_2: C4.2 R7.1 R8.2 | length 2.7
  Top Layer w0.203: R8.2 cw(c39.444,-1.515) 39.878,-1.515 39.878,-2.54 R7.1@39.878,-3.872
NetC6_1: C6.1 C7.2 D1.3 U5.1 | length 10.2
  Top Layer w0.203: U5.1 41.615,-7.644 41.996,-8.025 42.881,-8.025 C7.2 43.23,-8.324 44.823,-6.73 44.823,-6.448 C6.1 45.847,-5.374 46.99,-4.231 D1.3
NetIC1_2: IC1.2 IC2.2 Y1.1 | length 27.6
  Top Layer w0.203: IC1.2 8.509,-0.127 ; 8.509,7.387 8.509,-0.127 ; 8.509,7.388 cw(c10.594,7.39) 9.123,8.868 Y1.1 ; IC2.2 14.478,-1.143 13.97,-0.635 9.017,-0.635 8.509,-0.127
NetPPS1_1: PPS1.1 U4.1 | length 16.8
  Top Layer w0.203: U4.1 31.308,-8.57 33.274,-6.604 PPS1.1
NetR2_1: R2.1 U2.19 | length 3
  Top Layer w0.203: U2.19 33.301,-27.362 34.36,-27.362 35.244,-26.478 R2.1
NetR2_2: R2.2 U2.18 | length 2.9
  Top Layer w0.203: U2.18 33.573,-28.19 34.421,-28.19 34.733,-27.878 R2.2
NetR3_1: R3.1 U2.25 | length 2.4
  Top Layer w0.203: U2.25 R3.1@35.677,-18.089
NetR3_2: R3.2 U3.6 | length 2.3
  Top Layer w0.203: R3.2 36.956,-18.476 U3.6
NetR4_1: R4.1 U2.26 | length 2.4
  Top Layer w0.203: U2.26 R4.1@35.651,-16.989
NetR4_2: R4.2 U3.4 | length 2.3
  Top Layer w0.203: R4.2 36.956,-16.576 U3.4
NetR5_2: R5.2 U4.6 | length 2.4
  Top Layer w0.203: R5.2 15.239,-8.57 U4.6
NetR6_2: R6.2 U4.4 | length 2.5
  Top Layer w0.203: R6.2 16.002,-6.985 16.317,-6.67 U4.4
NetR7_2: R7.2 U5.3 U5.4 | length 3.7
  Top Layer w0.203: U5.4 39.665,-5.786 cw(c40.392,-5.786) 39.878,-5.272 cw(c38.823,-6.327) 40.315,-6.327 U5.3
NetR9_1: R9.1 U5.5 | length 2.4
  Top Layer w0.4: R9.1 38.265,-9.844 cw(c38.265,-11.244) U5.5
NetU3_1: U3.1 USB_debug1.2 | length 2.6
  Top Layer w0.203: U3.1 42.23,-18.476 42.813,-17.893 43.53,-17.893 USB_debug1.2
NetU3_3: U3.3 USB_debug1.3 | length 2.6
  Top Layer w0.203: U3.3 42.23,-16.576 42.701,-17.047 43.53,-17.047 USB_debug1.3
SCL_DAC: U2.23 U5.6 | length 14.3
  Top Layer w0.203: v4(31.781,-20.289) U2.23 ; v4(39.878,-12.827) 40.315,-12.39 U5.6
  Bottom Layer w0.203: v4@31.851,-20.219 32.486,-20.219 v4(39.878,-12.827)
SDA_DAC: U2.22 U5.7 | length 16.2
  Top Layer w0.203: v4(31.824,-21.389) U2.22 ; U5.7 40.965,-12.517 v4(41.275,-12.827)
  Bottom Layer w0.203: v4(31.824,-21.389) 39.497,-13.716 40.386,-13.716 v4(41.275,-12.827)
TIMEPULSE: R5.1 U2.28 | length 23
  Top Layer w0.203: R5.1 14.057,-8.788 14.057,-9.104 15.24,-10.287 30.099,-10.287 33.147,-13.335 33.147,-14.662 U2.28@33.217,-14.732
UART_RXD: P1.24 U2.4 | length 22.1
  Top Layer w0.203: v1@14.351,-18.161 14.423,-18.089 U2.4
  Bottom Layer w0.203: v1@14.605,-18.288 14.732,-18.288 15.621,-19.177 15.621,-33.63 P1.24
  other v1: 14.224,-18.288
UART_TXD: P1.22 U2.3 | length 25.4
  Top Layer w0.203: v1@14.351,-16.891 14.449,-16.989 U2.3
  Bottom Layer w0.203: v1@14.351,-16.891 14.986,-16.891 16.129,-18.034 16.129,-32.385 20.191,-36.447 20.978,-36.447 P1.22
  other v1: 14.4,-16.94
VREF: U5.2 Y1.4 | length 45
  Top Layer w0.203: Y1.4 35.324,33.637 cw(c33.528,31.841) 36.068,31.841 36.068,14.768 ccw(c38.608,14.768) 36.812,12.972 40.912,8.872 cw(c39.116,7.076) 41.656,7.076 41.656,2.085 ccw(c42.09,2.085) 41.783,1.778 cw(c41.17,1.165) 42.037,1.165 42.037,-0.635 cw(c41.529,-0.635) 41.529,-1.143 ccw(c41.529,-2.032) 40.64,-2.032 40.64,-3.355 ccw(c41.27,-3.355) 40.698,-3.618 ccw(c41.27,-3.355) 40.825,-3.8 cw(c39.855,-4.341) 40.965,-4.341 U5.2
pads on no net: D1.2 IC1.1 IC2.1 P1.10 P1.12 P1.14 P1.16 P1.18 P1.20 P1.26 P1.28 P1.30 P1.32 P1.34 P1.36 P2.1 P2.2 P2.3 P2.4 P2.5 P2.6 P2.7 P2.8 P2.9 P2.10 P2.11 P2.12 P2.13 P2.14 P2.15 P2.16 P2.17 P2.18 P2.19 P2.20 P2.21 P2.22 P2.23 P2.24 P2.25 P2.26 P2.27 P2.28 P2.29 P2.30 P2.31 P2.32 P2.33 P2.34 P2.35 P2.36 U2.1 U2.2 U2.5 U2.8 U2.10 U2.12 U2.20 USB_debug1.4

## Polygon pours and split planes (outlines as drawn)
DGND on Top Layer (solid, pour order 221): 156 vertices, not listed, extent 18.155,-8.034 26.272,-2.303
DGND on Top Layer (solid, pour order 220): 156 vertices, not listed, extent 18.155,-9.934 35.035,-2.303
DGND on Top Layer (solid, pour order 219): 14.453,-7.031 14.71,-7.137 14.93,-7.307 15.1,-7.527 15.206,-7.784 15.242,-8.059 15.242,-8.629 15.726,-9.113 30.099,-9.113 30.168,-9.122 30.238,-9.122 30.305,-9.14 30.374,-9.149 30.439,-9.176 30.473,-9.185 30.506,-9.194 30.584,-9.226 30.644,-9.261 30.709,-9.288 30.764,-9.33 30.825,-9.365 30.874,-9.414 30.929,-9.457 33.977,-12.505 34.02,-12.56 34.069,-12.609 34.104,-12.67 34.146,-12.725 34.173,-12.79 34.208,-12.85 34.24,-12.928 34.245,-12.944 34.258,-12.995 34.285,-13.06 34.294,-13.129 34.312,-13.196 34.312,-13.266 34.321,-13.335 34.321,-13.344 34.449,-13.361 34.706,-13.467 34.926,-13.637 35.096,-13.857 35.202,-14.114 35.238,-14.389 35.238,-15.189 35.202,-15.464 35.096,-15.721 34.926,-15.941 34.706,-16.111 34.449,-16.217 34.174,-16.253 32.374,-16.253 32.099,-16.217 31.842,-16.111 31.622,-15.941 31.452,-15.721 31.346,-15.464 31.31,-15.189 31.31,-14.389 31.346,-14.114 31.452,-13.857 31.622,-13.637 31.716,-13.564 29.613,-11.461 15.24,-11.461 15.171,-11.452 15.101,-11.452 15.034,-11.434 14.965,-11.425 14.9,-11.398 14.866,-11.389 14.833,-11.38 14.755,-11.348 14.695,-11.313 14.63,-11.286 14.575,-11.244 14.514,-11.209 14.465,-11.16 14.41,-11.117 13.306,-10.014 13.103,-9.987 12.846,-9.881 12.626,-9.711 12.456,-9.491 12.35,-9.234 12.314,-8.959 12.314,-8.059 12.35,-7.784 12.456,-7.527 12.626,-7.307 12.846,-7.137 13.103,-7.031 13.378,-6.995 14.178,-6.995
DGND on Top Layer (solid, pour order 218): 8.134,-3.051 8.391,-3.157 8.611,-3.327 8.781,-3.547 8.887,-3.804 8.923,-4.079 8.923,-5.279 8.887,-5.554 8.781,-5.811 8.733,-5.873 8.733,-6.438 12.551,-10.256 27.94,-10.256 28.009,-10.265 28.079,-10.265 28.146,-10.283 28.215,-10.292 28.28,-10.319 28.314,-10.328 28.347,-10.337 28.425,-10.369 28.485,-10.404 28.55,-10.431 28.605,-10.473 28.666,-10.508 28.715,-10.557 28.77,-10.6 32.587,-14.416 32.975,-14.416 33.039,-14.425 34.174,-14.425 34.449,-14.461 34.706,-14.567 34.926,-14.737 35.096,-14.957 35.202,-15.214 35.238,-15.489 35.238,-16.289 35.202,-16.564 35.096,-16.821 34.926,-17.041 34.706,-17.211 34.449,-17.317 34.174,-17.353 32.374,-17.353 32.099,-17.317 31.842,-17.211 31.622,-17.041 31.452,-16.821 31.346,-16.564 31.334,-16.471 31.326,-16.463 31.27,-16.421 27.454,-12.604 12.065,-12.604 11.996,-12.595 11.926,-12.595 11.859,-12.577 11.79,-12.568 11.725,-12.541 11.658,-12.523 11.627,-12.51 11.58,-12.491 11.52,-12.456 11.455,-12.429 11.4,-12.387 11.339,-12.352 11.29,-12.303 11.235,-12.26 6.729,-7.754 6.686,-7.699 6.637,-7.65 6.602,-7.589 6.56,-7.534 6.533,-7.469 6.498,-7.409 6.466,-7.331 6.461,-7.315 6.448,-7.264 6.421,-7.199 6.412,-7.13 6.394,-7.063 6.394,-6.993 6.385,-6.924 6.385,-5.873 6.337,-5.811 6.231,-5.554 6.195,-5.279 6.195,-4.079 6.231,-3.804 6.337,-3.547 6.507,-3.327 6.727,-3.157 6.984,-3.051 7.259,-3.015 7.859,-3.015
DGND on Top Layer (solid, pour order 217): 199 vertices, not listed, extent 7.242,-3.746 17.27,17.015
DGND on Top Layer (solid, pour order 216): 14.103,-2.924 14.36,-3.03 14.58,-3.2 14.75,-3.42 14.856,-3.677 14.892,-3.952 14.892,-5.152 14.856,-5.427 14.762,-5.653 14.93,-5.783 15.1,-6.003 15.206,-6.26 15.242,-6.535 15.242,-7.435 15.206,-7.71 15.1,-7.967 14.93,-8.187 14.71,-8.357 14.453,-8.463 14.178,-8.499 13.378,-8.499 13.103,-8.463 12.846,-8.357 12.626,-8.187 12.456,-7.967 12.35,-7.71 12.314,-7.435 12.314,-6.535 12.35,-6.26 12.354,-6.25 12.354,-5.746 12.306,-5.684 12.2,-5.427 12.164,-5.152 12.164,-3.952 12.2,-3.677 12.306,-3.42 12.476,-3.2 12.696,-3.03 12.953,-2.924 13.228,-2.888 13.828,-2.888
DGND on Top Layer "DGND_L01_P036" (solid, pour order 36): 50.038,2.032 -0.127,2.032 -0.254,1.905 -0.127,1.778 -0.127,-41.021 49.911,-41.021 49.911,-34.417 49.911,-5.588
DGND on Top Layer "DGND_L01_P000" (solid, pour order 0): 1.524,4.699 1.524,2.794 ccw(c2.921,2.794) 2.921,1.397 47.117,1.397 ccw(c47.117,2.794) 48.514,2.794 48.514,47.371 ccw(c47.498,47.371) 47.498,48.387 2.54,48.387 ccw(c2.54,47.244) 1.397,47.244
DGND on Int1 (GND) "DGND_L02_P033" (solid, pour order 33): 1.578,2.387 1.578,-40.694 2.032,-41.148 48.008,-41.148 48.008,1.709
DGND on Int1 (GND) "DGND_L02_P001" (solid, pour order 1): 1.524,4.699 1.524,2.794 ccw(c2.921,2.794) 2.921,1.397 47.117,1.397 ccw(c47.117,2.794) 48.514,2.794 48.514,47.371 ccw(c47.498,47.371) 47.498,48.387 2.54,48.387 ccw(c2.54,47.244) 1.397,47.244
DGND on Bottom Layer "DGND_L04_P037" (solid, pour order 37): 49.784,-41.275 -0.127,-41.275 -0.127,1.651 0,1.778 49.657,1.778 49.657,-22.987 47.752,-24.892 29.083,-24.892 28.956,-24.765 28.956,-34.798 41.529,-34.798 46.228,-30.099 49.784,-30.099
DGND on Bottom Layer "DGND_L04_P022" (solid, pour order 22): 11.43,38.481 37.846,38.481 37.846,12.319 12.573,12.319
+5V on Int2 (PWR) "+5V_L03_P035" (solid, pour order 35): 37.719,-35.306 37.719,-41.021 49.784,-41.021 49.911,-41.148 50.038,-41.021 50.038,1.016 48.387,2.667 37.465,2.667 37.465,-22.86 41.021,-26.416 41.021,-35.306
+3.3V on Int2 (PWR) "+3.3V_L03_P034" (solid, pour order 34): -0.254,-41.148 -0.127,-41.021 -0.127,1.143 36.703,1.143 36.83,1.016 36.83,-12.319 21.717,-12.319 19.939,-14.097 19.939,-35.433 36.576,-35.433 37.338,-36.195 36.576,-36.957 36.576,-41.021

## Keep-outs
Keep-Out Layer:
  circle w0.15: c4.953,4.831 r2.1
  circle w0.15: c44.953,44.831 r2.1
  circle w0.15: c44.953,4.831 r2.1
  circle w0.15: c4.953,44.831 r2.1
  lines w0.254: 49.911,-5.588 48.006,-5.588 48.006,-13.208 48.006,-21.082 48.006,-28.702 49.911,-28.702 49.911,-41.148 49.899,-41.136 48.399,-41.136 -0.063,-41.136 -0.063,-20.13 -0.063,57.594 -0.063,58.864 0.318,58.864 49.937,58.864 49.937,-5.588 ; 7.684,9.715 10.336,12.367 ccw(c8.168,14.535) 11.234,14.535 11.234,34.994 ccw(c8.168,34.994) 10.336,37.162 7.684,39.814 7.684,9.715 ; 9.97,7.429 12.755,10.214 cw(c14.923,8.046) 14.923,11.112 34.989,11.112 cw(c34.989,8.046) 37.157,10.214 39.942,7.429 9.97,7.429 ; 9.97,42.1 12.628,39.442 ccw(c14.796,41.61) 14.796,38.544 32.449,38.544 35.116,38.544 ccw(c35.116,41.61) 37.284,39.442 39.942,42.1 9.97,42.1 ; 38.672,14.541 ccw(c41.738,14.541) 39.57,12.373 42.228,9.715 42.228,39.814 39.57,37.156 ccw(c41.738,34.988) 38.672,34.988 38.672,14.541

## Other copper
Top Layer:
  pour cut-out: 24.74,-3.033 24.783,-3.048 24.828,-3.057 24.999,-3.128 25.037,-3.153 25.078,-3.174 25.224,-3.286 25.255,-3.32 25.289,-3.351 25.401,-3.497 25.422,-3.538 25.447,-3.576 25.518,-3.747 25.527,-3.792 25.542,-3.835 25.566,-4.018 25.563,-4.064 25.566,-4.11 25.542,-4.293 25.527,-4.336 25.518,-4.381 25.447,-4.552 25.422,-4.59 25.401,-4.631 25.289,-4.777 25.255,-4.808 25.224,-4.842 25.078,-4.954 25.037,-4.975 24.999,-5 24.973,-5.011 24.973,-5.969 24.967,-5.996 24.946,-6.104 24.914,-6.181 24.857,-6.267 24.837,-6.295 24.136,-6.996 24.051,-7.054 24.022,-7.073 23.984,-7.089 23.945,-7.105 23.837,-7.126 23.81,-7.132 20.726,-7.132 20.668,-7.219 20.554,-7.295 20.419,-7.322 19.219,-7.322 19.084,-7.295 18.97,-7.219 18.894,-7.105 18.867,-6.97 18.867,-6.37 18.894,-6.235 18.97,-6.121 19.084,-6.045 19.219,-6.018 20.419,-6.018 20.554,-6.045 20.668,-6.121 20.726,-6.208 23.619,-6.208 24.049,-5.778 24.049,-5.011 24.023,-5 23.985,-4.975 23.944,-4.954 23.798,-4.842 23.767,-4.808 23.733,-4.777 23.621,-4.631 23.6,-4.59 23.575,-4.552 23.504,-4.381 23.495,-4.336 23.48,-4.293 23.456,-4.11 23.459,-4.064 23.456,-4.018 23.48,-3.835 23.495,-3.792 23.504,-3.747 23.575,-3.576 23.6,-3.538 23.621,-3.497 23.733,-3.351 23.767,-3.32 23.798,-3.286 23.944,-3.174 23.985,-3.153 24.023,-3.128 24.194,-3.057 24.239,-3.048 24.282,-3.033 24.465,-3.009 24.511,-3.012 24.557,-3.009
  pour cut-out: 33.503,-3.033 33.546,-3.048 33.591,-3.057 33.762,-3.128 33.8,-3.153 33.841,-3.174 33.987,-3.286 34.018,-3.32 34.052,-3.351 34.164,-3.497 34.185,-3.538 34.21,-3.576 34.281,-3.747 34.29,-3.792 34.305,-3.835 34.329,-4.018 34.326,-4.064 34.329,-4.11 34.305,-4.293 34.29,-4.336 34.281,-4.381 34.21,-4.552 34.185,-4.59 34.164,-4.631 34.052,-4.777 34.018,-4.808 33.987,-4.842 33.841,-4.954 33.8,-4.975 33.762,-5 33.736,-5.011 33.736,-6.604 33.73,-6.631 33.709,-6.739 33.677,-6.816 33.62,-6.902 33.6,-6.93 31.634,-8.896 31.549,-8.953 31.52,-8.973 31.482,-8.989 31.443,-9.005 31.335,-9.026 31.308,-9.032 20.726,-9.032 20.668,-9.119 20.554,-9.195 20.419,-9.222 19.219,-9.222 19.084,-9.195 18.97,-9.119 18.894,-9.005 18.867,-8.87 18.867,-8.27 18.894,-8.135 18.97,-8.021 19.084,-7.945 19.219,-7.918 20.419,-7.918 20.554,-7.945 20.668,-8.021 20.726,-8.108 31.117,-8.108 32.812,-6.413 32.812,-5.011 32.786,-5 32.748,-4.975 32.707,-4.954 32.561,-4.842 32.53,-4.808 32.496,-4.777 32.384,-4.631 32.363,-4.59 32.338,-4.552 32.267,-4.381 32.258,-4.336 32.243,-4.293 32.219,-4.11 32.222,-4.064 32.219,-4.018 32.243,-3.835 32.258,-3.792 32.267,-3.747 32.338,-3.576 32.363,-3.538 32.384,-3.497 32.496,-3.351 32.53,-3.32 32.561,-3.286 32.707,-3.174 32.748,-3.153 32.786,-3.128 32.957,-3.057 33.002,-3.048 33.045,-3.033 33.228,-3.009 33.274,-3.012 33.32,-3.009
  pour cut-out: 14.313,-7.734 14.427,-7.81 14.503,-7.924 14.53,-8.059 14.53,-8.924 15.431,-9.825 30.099,-9.825 30.126,-9.831 30.234,-9.852 30.311,-9.884 30.425,-9.961 33.473,-13.009 33.53,-13.094 33.55,-13.123 33.582,-13.2 33.603,-13.308 33.609,-13.335 33.609,-14.037 34.174,-14.037 34.309,-14.064 34.423,-14.14 34.499,-14.254 34.526,-14.389 34.526,-15.189 34.499,-15.324 34.423,-15.438 34.309,-15.514 34.174,-15.541 32.374,-15.541 32.239,-15.514 32.125,-15.438 32.049,-15.324 32.022,-15.189 32.022,-14.389 32.049,-14.254 32.125,-14.14 32.239,-14.064 32.374,-14.037 32.685,-14.037 32.685,-13.526 29.908,-10.749 15.24,-10.749 15.213,-10.743 15.105,-10.722 15.028,-10.69 14.914,-10.613 13.731,-9.431 13.674,-9.345 13.655,-9.317 13.652,-9.311 13.378,-9.311 13.243,-9.284 13.129,-9.208 13.053,-9.094 13.026,-8.959 13.026,-8.059 13.053,-7.924 13.129,-7.81 13.243,-7.734 13.378,-7.707 14.178,-7.707
  pour cut-out: 7.994,-3.754 8.108,-3.83 8.184,-3.944 8.211,-4.079 8.211,-5.279 8.184,-5.414 8.108,-5.528 8.021,-5.586 8.021,-6.733 12.256,-10.968 27.94,-10.968 27.967,-10.974 28.075,-10.995 28.152,-11.027 28.266,-11.104 32.292,-15.129 32.975,-15.129 32.976,-15.129 33.002,-15.134 33.018,-15.137 34.174,-15.137 34.309,-15.164 34.423,-15.24 34.499,-15.354 34.526,-15.489 34.526,-16.289 34.499,-16.424 34.423,-16.538 34.309,-16.614 34.174,-16.641 32.374,-16.641 32.239,-16.614 32.125,-16.538 32.049,-16.424 32.022,-16.289 32.022,-16.036 32.003,-16.033 31.966,-16.025 31.903,-15.999 31.888,-15.993 31.872,-15.982 31.774,-15.917 27.749,-11.892 12.065,-11.892 11.985,-11.876 11.953,-11.869 11.93,-11.865 11.879,-11.844 11.853,-11.833 11.836,-11.822 11.739,-11.756 7.233,-7.25 7.175,-7.165 7.156,-7.136 7.124,-7.059 7.103,-6.951 7.097,-6.924 7.097,-5.586 7.01,-5.528 6.934,-5.414 6.907,-5.279 6.907,-4.079 6.934,-3.944 7.01,-3.83 7.124,-3.754 7.259,-3.727 7.859,-3.727
  pour cut-out: 184 vertices and 0 holes, not listed, extent 7.955,-3.033 16.563,16.308
  pour cut-out: 13.963,-3.627 14.077,-3.703 14.153,-3.817 14.18,-3.952 14.18,-5.152 14.153,-5.287 14.077,-5.401 13.99,-5.459 13.99,-6.183 14.178,-6.183 14.313,-6.21 14.427,-6.286 14.503,-6.4 14.53,-6.535 14.53,-7.435 14.503,-7.57 14.427,-7.684 14.313,-7.76 14.178,-7.787 13.378,-7.787 13.243,-7.76 13.129,-7.684 13.053,-7.57 13.026,-7.435 13.026,-6.535 13.053,-6.4 13.066,-6.38 13.066,-5.459 12.979,-5.401 12.903,-5.287 12.876,-5.152 12.876,-3.952 12.903,-3.817 12.979,-3.703 13.093,-3.627 13.228,-3.6 13.828,-3.6
  pour cut-out: 39.942,42.1 cw(c39.942,39.814) 42.228,39.814 42.228,39.106 cw(c39.688,39.106) 39.688,36.566 38.501,36.566 cw(c38.501,38.777) 36.289,38.777
  pour cut-out: 10.301,41.958 ccw(c9.582,40.202) 7.684,40.202 7.684,38.387 ccw(c10.224,38.387) 10.224,35.847 11.523,35.847 ccw(c11.523,38.085) 13.762,38.085 13.762,39.16
Int1 (GND):
  pour cut-out: 9.97,42.1 ccw(c9.97,39.814) 7.684,39.814 7.684,38.35 ccw(c10.224,38.35) 10.224,35.81 11.533,35.81 ccw(c11.533,38.039) 13.762,38.039 13.762,38.72
  pour cut-out: 39.942,42.1 cw(c39.942,39.814) 42.228,39.814 42.228,39.074 cw(c39.688,39.074) 39.688,36.534 38.533,36.534 cw(c38.533,38.777) 36.289,38.777

## Silkscreen, mask and mechanical layers (free items; w line width, h text height)
Top Overlay:
  lines w0.254: 1.461,2.603 ccw(c2.731,2.603) 2.731,1.333 3.467,1.333 45.911,1.333 47.181,1.333 ccw(c47.181,2.603) 48.451,2.603 48.451,5.08 48.451,22.796 48.451,40.83 48.451,47.434 ccw(c47.562,47.434) 47.562,48.323 46.165,48.323 6.16,48.323 2.35,48.323 ccw(c2.35,47.434) 1.461,47.434 1.461,38.544 1.461,4.508 1.461,2.603
  text "OCXO timebase" at 17.463,49.593 h1.52
  text "Micron-GLIN v.2 / (c)Shodan (Tula, Russia) / https://ampnuts.com" at 9.477,-34.947 h2.7 r90
Top Paste:
  lines w0.254: -0.127,-41.148 -0.127,58.928 50.038,58.928 50.038,-41.148 -0.127,-41.148
Top Solder:
  rectangle: 31.496,-32.258 39.497,-29.083

## Dimensions
3.347,-39.136 to -0.063,-41.136 on Mechanical 1
3.347,56.864 to 0.318,58.864 on Mechanical 1
3.347,56.864 to -0.063,57.594 on Mechanical 1

## Text inside footprints (layer, text, board x,y; h text height)
P1: Bottom Overlay "36" at 1.823,-37.104 h0.75; Bottom Overlay "35" at 1.823,-39.644 h0.75; Bottom Overlay "1" at 48.813,-39.263 h0.75; Bottom Overlay "2" at 48.94,-36.85 h0.75
P2: Bottom Overlay "36" at 1.823,56.356 h0.75; Bottom Overlay "35" at 1.823,53.816 h0.75; Bottom Overlay "1" at 49.067,53.816 h0.75; Bottom Overlay "2" at 49.149,56.388 h0.75